# EAGLE board full computer (EAGLE 9.6.2), part 1 of 2
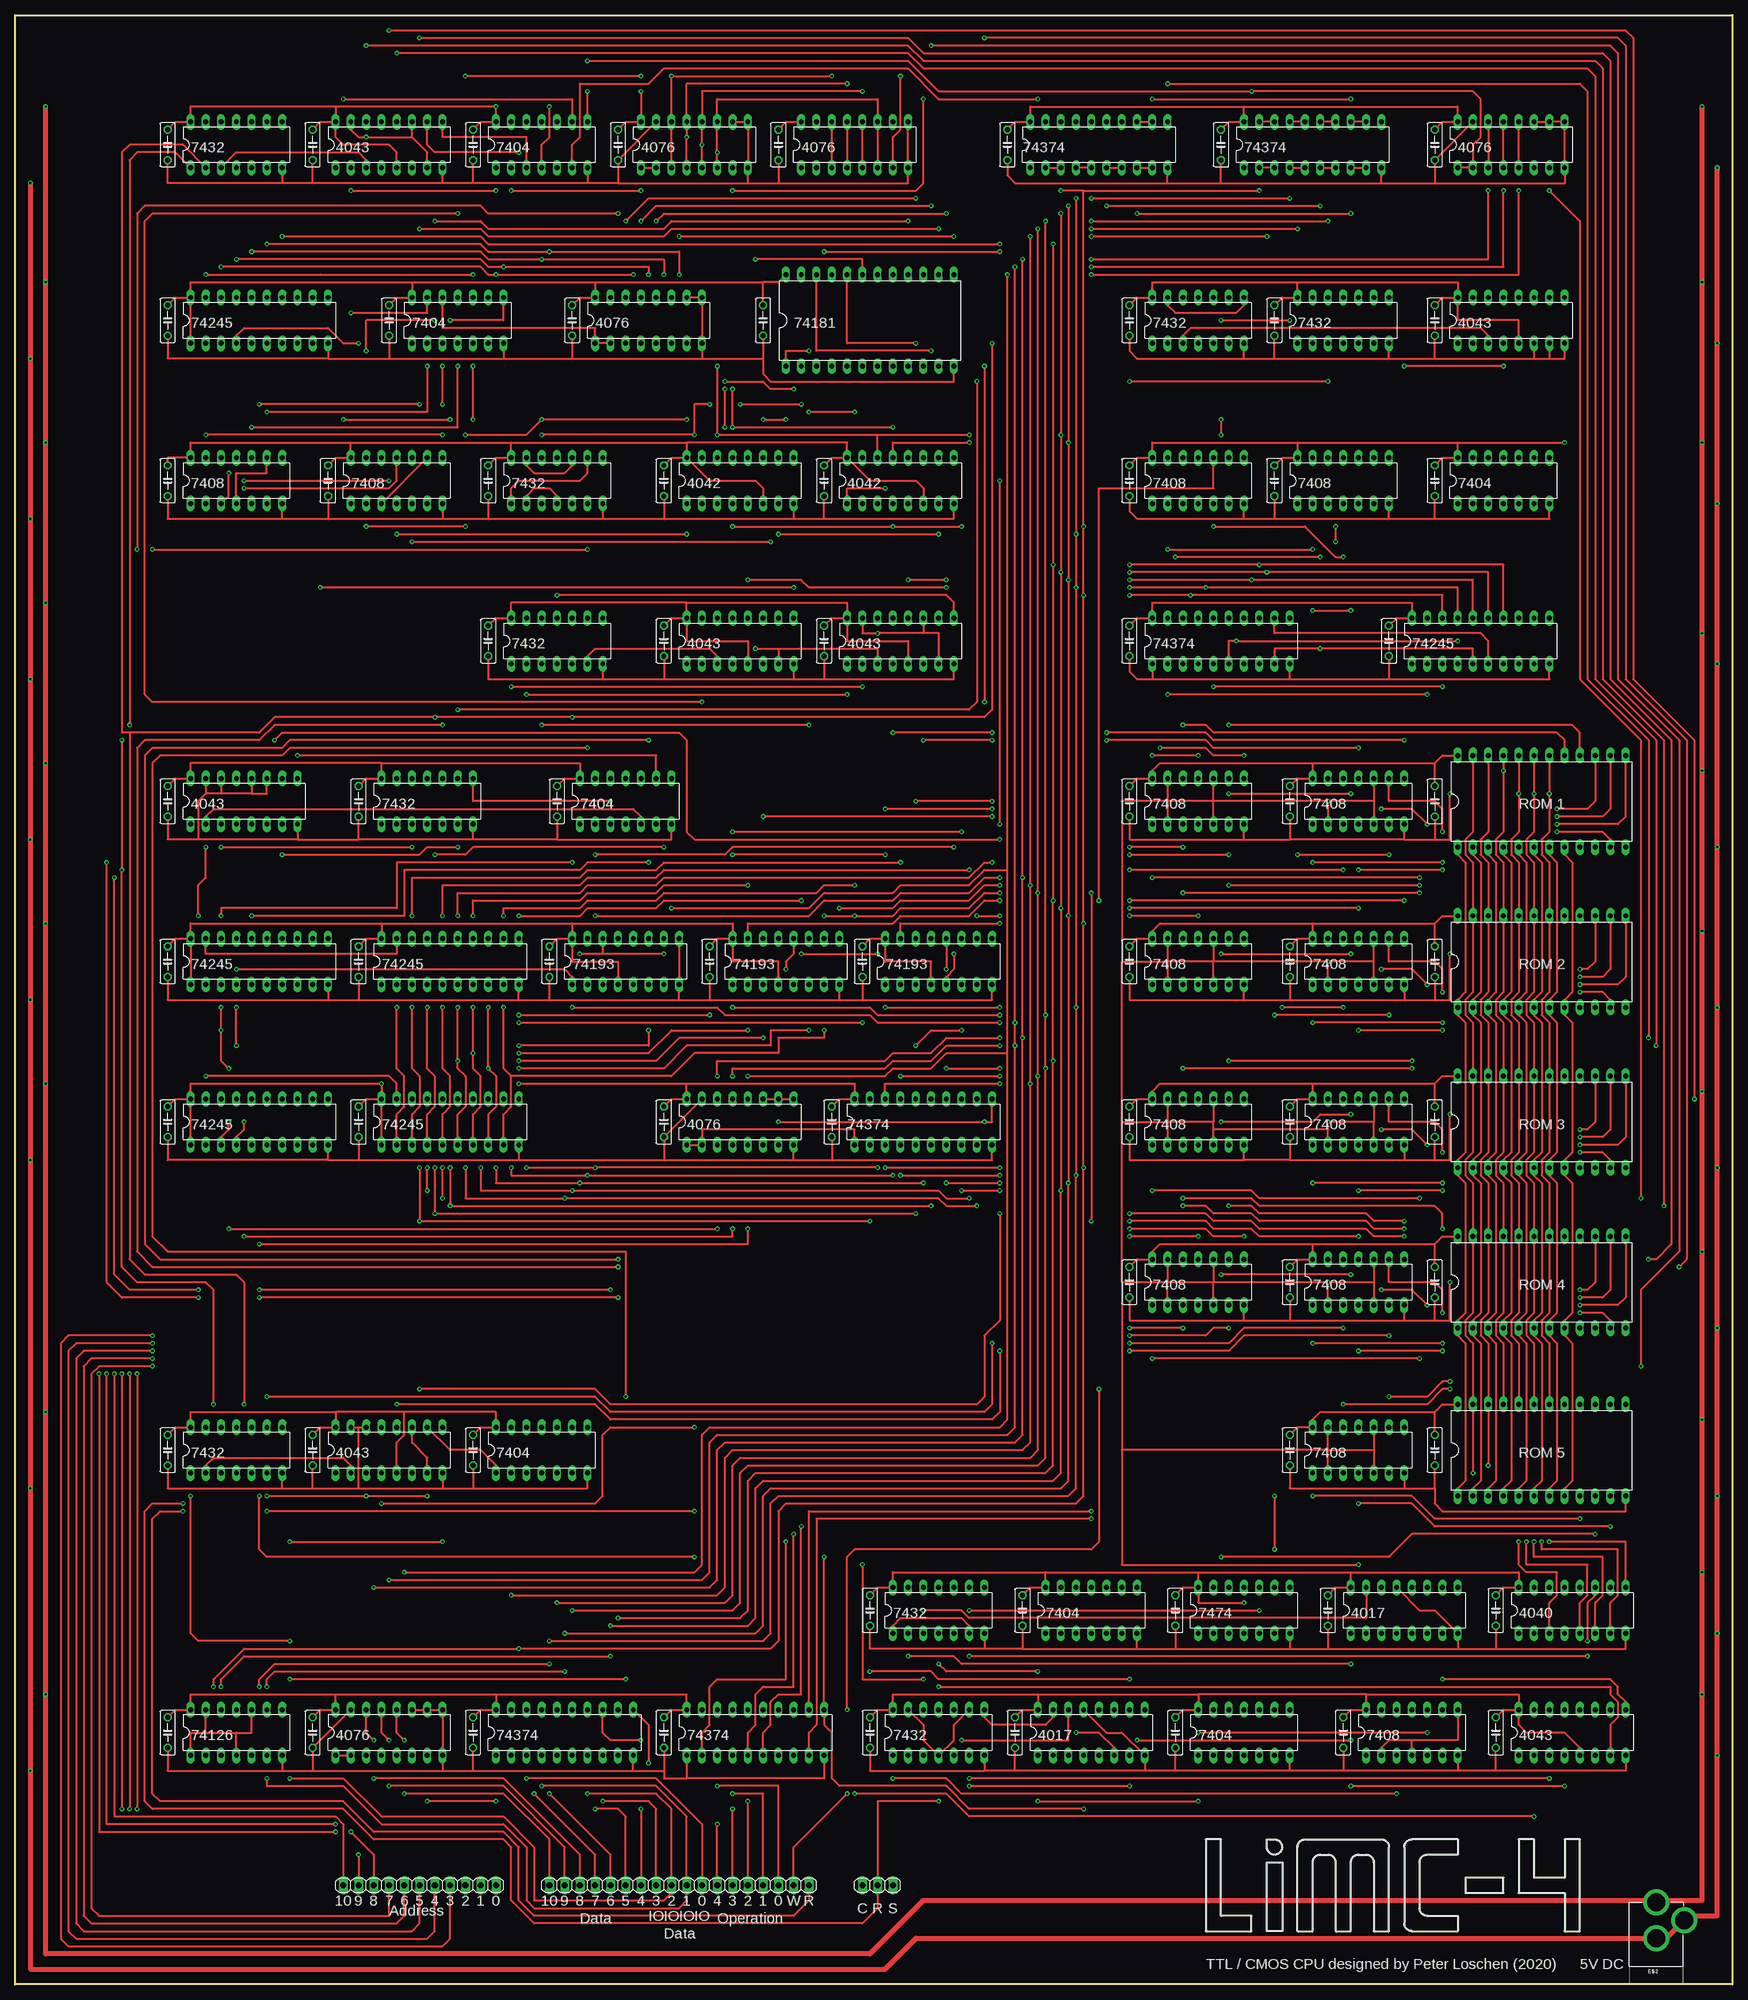
[diagram p0: board, top side]
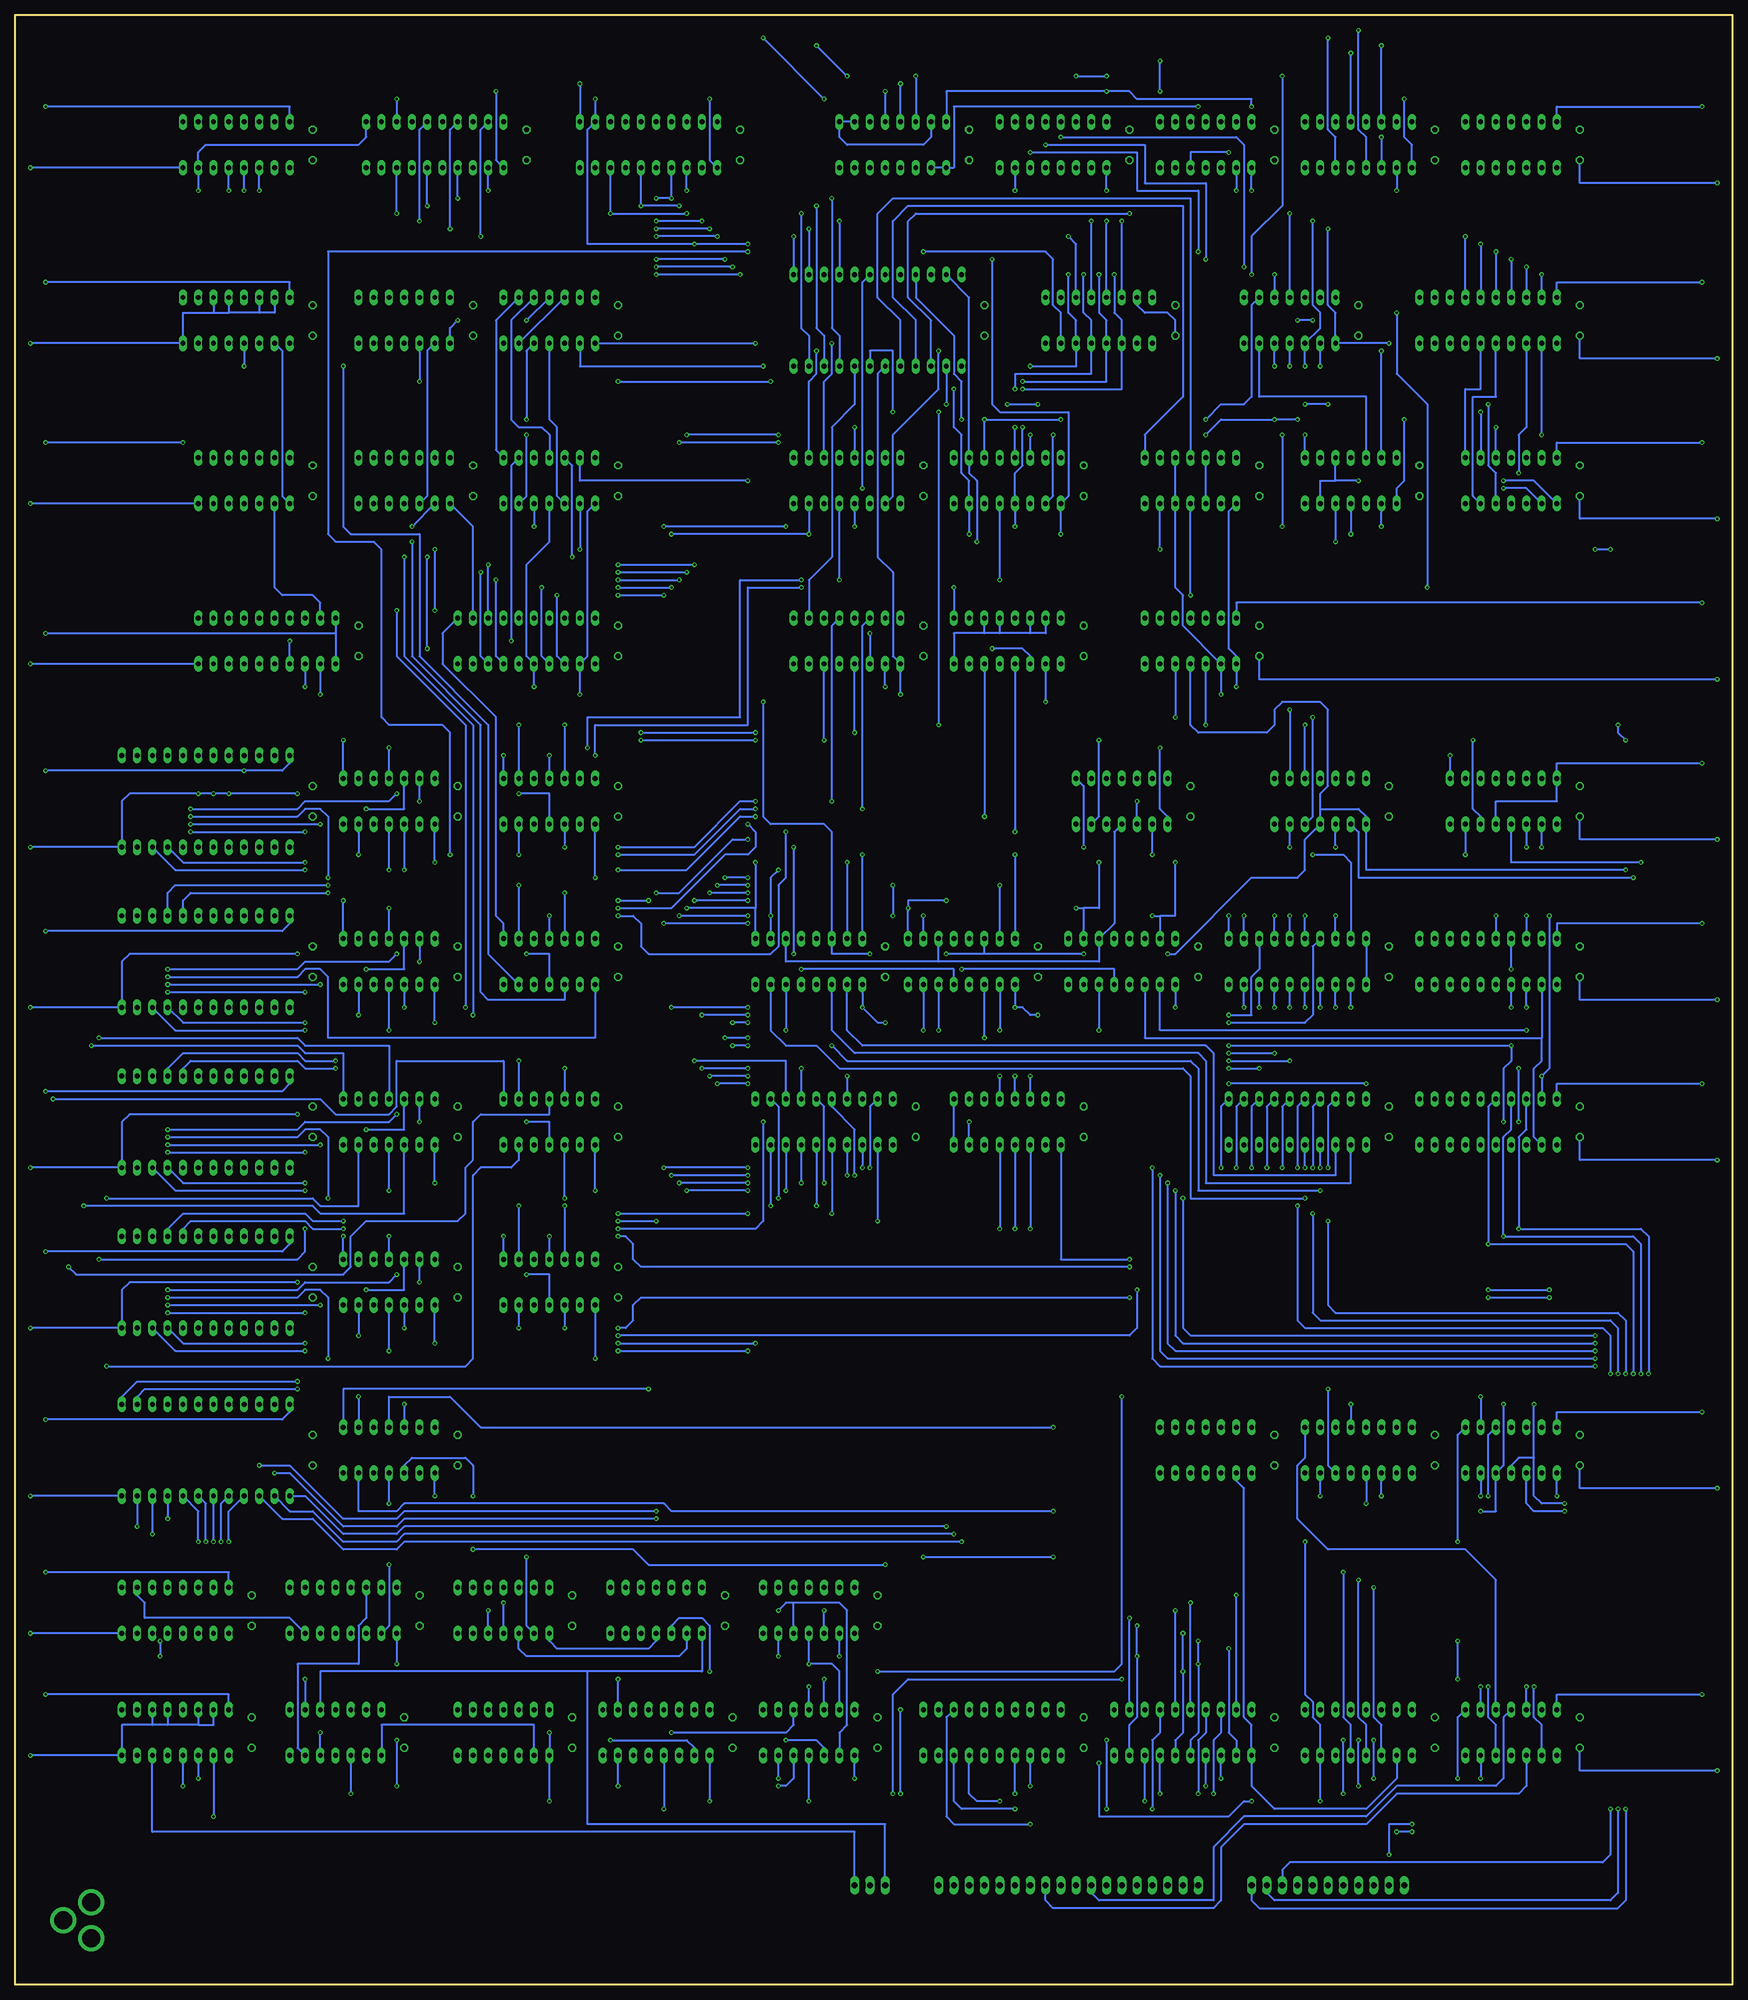
[diagram p1: board, bottom side, seen from below]

Size 285.75 x 327.66 mm. Coordinates in mm from the lower left corner, seen from the top.
Outline: 0,327.66 285.75,327.66 285.75,0 0,0 0,327.66
Copper layers (1*16): Top 0.035mm / dielectric 1.5mm / Bottom 0.035mm
Design rules "default": minimum track width 6mil, minimum drill 0.35mm, track to track 6mil, track to pad 6mil, pad to pad 6mil, via to via 6mil, smd to smd 6mil, copper to edge 40mil, drill to drill 6mil, minimum pad ring 10mil, minimum via ring 8mil, stop-mask expansion 4mil, vias tented up to drill 0mil, thermal gap 10mil

## Footprints (pad centres in the part's own frame; a part is rotated, then mirrored left to right if it is on the bottom)
C050-025X075 = drill 0.813 octagon: 1 -2.54,0; 2 2.54,0
POWER_JACK_PTH = drill 2.997 pad 4.318: GND 0,7.7; GNDBREAK 4.7,10.7; PWR 0,13.7
DIL16 = drill 0.813 long: 1 -8.89,-3.81; 2 -6.35,-3.81; 3 -3.81,-3.81; 4 -1.27,-3.81; 5 1.27,-3.81; 6 3.81,-3.81; 7 6.35,-3.81; 8 8.89,-3.81; 9 8.89,3.81; 10 6.35,3.81; 11 3.81,3.81; 12 1.27,3.81; 13 -1.27,3.81; 14 -3.81,3.81; 15 -6.35,3.81; 16 -8.89,3.81
DIL14 = drill 0.813 long: 1 -7.62,-3.81; 2 -5.08,-3.81; 3 -2.54,-3.81; 4 0,-3.81; 5 2.54,-3.81; 6 5.08,-3.81; 7 7.62,-3.81; 8 7.62,3.81; 9 5.08,3.81; 10 2.54,3.81; 11 0,3.81; 12 -2.54,3.81; 13 -5.08,3.81; 14 -7.62,3.81
DIL24-6 = drill 0.813 long: 1 -13.97,-7.62; 2 -11.43,-7.62; 3 -8.89,-7.62; 4 -6.35,-7.62; 5 -3.81,-7.62; 6 -1.27,-7.62; 7 1.27,-7.62; 8 3.81,-7.62; 9 6.35,-7.62; 10 8.89,-7.62; 11 11.43,-7.62; 12 13.97,-7.62; 13 13.97,7.62; 14 11.43,7.62; 15 8.89,7.62; 16 6.35,7.62; 17 3.81,7.62; 18 1.27,7.62; 19 -1.27,7.62; 20 -3.81,7.62; 21 -6.35,7.62; 22 -8.89,7.62; 23 -11.43,7.62; 24 -13.97,7.62
DIL20 = drill 0.813 long: 1 -11.43,-3.81; 2 -8.89,-3.81; 3 -6.35,-3.81; 4 -3.81,-3.81; 5 -1.27,-3.81; 6 1.27,-3.81; 7 3.81,-3.81; 8 6.35,-3.81; 9 8.89,-3.81; 10 11.43,-3.81; 11 11.43,3.81; 12 8.89,3.81; 13 6.35,3.81; 14 3.81,3.81; 15 1.27,3.81; 16 -1.27,3.81; 17 -3.81,3.81; 18 -6.35,3.81; 19 -8.89,3.81; 20 -11.43,3.81
1X03 = drill 1.016 long: 1 -2.54,0; 2 0,0; 3 2.54,0
1X18 = drill 1.016 long: 1 -21.59,0; 2 -19.05,0; 3 -16.51,0; 4 -13.97,0; 5 -11.43,0; 6 -8.89,0; 7 -6.35,0; 8 -3.81,0; 9 -1.27,0; 10 1.27,0; 11 3.81,0; 12 6.35,0; 13 8.89,0; 14 11.43,0; 15 13.97,0; 16 16.51,0; 17 19.05,0; 18 21.59,0
1X11 = drill 1.016 long: 1 -12.7,0; 2 -10.16,0; 3 -7.62,0; 4 -5.08,0; 5 -2.54,0; 6 0,0; 7 2.54,0; 8 5.08,0; 9 7.62,0; 10 10.16,0; 11 12.7,0

## Placement (x,y rotation side)
E$1  [C050-025X075]  236.22,196.85 90 top
E$2  [POWER_JACK_PTH]  273.05,0 0 top
E$3  [C050-025X075]  236.22,170.18 90 top
E$4  [C050-025X075]  236.22,143.51 90 top
E$5  [C050-025X075]  236.22,116.84 90 top
E$6  [C050-025X075]  236.22,88.9 90 top
E$7  [C050-025X075]  212.09,88.9 90 top
E$8  [C050-025X075]  212.09,116.84 90 top
E$9  [C050-025X075]  212.09,143.51 90 top
E$10  [C050-025X075]  212.09,170.18 90 top
E$11  [C050-025X075]  212.09,196.85 90 top
E$12  [C050-025X075]  185.42,196.85 90 top
E$13  [C050-025X075]  185.42,170.18 90 top
E$14  [C050-025X075]  185.42,143.51 90 top
E$15  [C050-025X075]  185.42,116.84 90 top
E$16  [C050-025X075]  246.38,62.23 90 top
E$17  [C050-025X075]  218.44,62.23 90 top
E$18  [C050-025X075]  193.04,62.23 90 top
E$19  [C050-025X075]  167.64,62.23 90 top
E$20  [C050-025X075]  142.24,62.23 90 top
E$21  [C050-025X075]  142.24,41.91 90 top
E$22  [C050-025X075]  166.37,41.91 90 top
E$23  [C050-025X075]  193.04,41.91 90 top
E$24  [C050-025X075]  25.4,41.91 90 top
E$25  [C050-025X075]  246.38,41.91 90 top
E$26  [C050-025X075]  220.98,41.91 90 top
E$27  [C050-025X075]  107.95,41.91 90 top
E$28  [C050-025X075]  76.2,41.91 90 top
E$29  [C050-025X075]  49.53,41.91 90 top
E$30  [C050-025X075]  25.4,88.9 90 top
E$31  [C050-025X075]  49.53,88.9 90 top
E$32  [C050-025X075]  76.2,88.9 90 top
E$33  [C050-025X075]  135.89,143.51 90 top
E$34  [C050-025X075]  107.95,143.51 90 top
E$35  [C050-025X075]  57.15,143.51 90 top
E$36  [C050-025X075]  25.4,143.51 90 top
E$37  [C050-025X075]  25.4,170.18 90 top
E$38  [C050-025X075]  57.15,170.18 90 top
E$39  [C050-025X075]  88.9,170.18 90 top
E$40  [C050-025X075]  115.57,170.18 90 top
E$41  [C050-025X075]  140.97,170.18 90 top
E$42  [C050-025X075]  25.4,196.85 90 top
E$43  [C050-025X075]  57.15,196.85 90 top
E$44  [C050-025X075]  90.17,196.85 90 top
E$45  [C050-025X075]  185.42,223.52 90 top
E$46  [C050-025X075]  228.6,223.52 90 top
E$47  [C050-025X075]  185.42,250.19 90 top
E$48  [C050-025X075]  209.55,250.19 90 top
E$49  [C050-025X075]  185.42,276.86 90 top
E$50  [C050-025X075]  209.55,276.86 90 top
E$51  [C050-025X075]  236.22,276.86 90 top
E$52  [C050-025X075]  236.22,250.19 90 top
E$53  [C050-025X075]  124.46,276.86 90 top
E$54  [C050-025X075]  107.95,250.19 90 top
E$55  [C050-025X075]  134.62,250.19 90 top
E$56  [C050-025X075]  78.74,250.19 90 top
E$57  [C050-025X075]  52.07,250.19 90 top
E$58  [C050-025X075]  25.4,250.19 90 top
E$59  [C050-025X075]  92.71,276.86 90 top
E$60  [C050-025X075]  62.23,276.86 90 top
E$61  [C050-025X075]  134.62,223.52 90 top
E$62  [C050-025X075]  107.95,223.52 90 top
E$63  [C050-025X075]  25.4,276.86 90 top
E$64  [C050-025X075]  78.74,223.52 90 top
E$65  [C050-025X075]  76.2,306.07 90 top
E$66  [C050-025X075]  49.53,306.07 90 top
E$67  [C050-025X075]  25.4,306.07 90 top
E$68  [C050-025X075]  100.33,306.07 90 top
E$69  [C050-025X075]  127,306.07 90 top
E$70  [C050-025X075]  236.22,306.07 90 top
E$71  [C050-025X075]  200.66,306.07 90 top
E$72  [C050-025X075]  165.1,306.07 90 top
IC1  4017N  [DIL16]  179.07,41.91 0 top
IC2  4043N  [DIL16]  259.08,41.91 0 top
IC3  74LS32N  [DIL14]  153.67,41.91 0 top
IC4  74ALS08N  [DIL14]  232.41,41.91 0 top
IC5  74ALS04N  [DIL14]  204.47,41.91 0 top
IC6  4040N  [DIL16]  259.08,62.23 0 top
IC7  4017N  [DIL16]  231.14,62.23 0 top
IC8  74LS32N  [DIL14]  153.67,62.23 0 top
IC9  74LS74N  [DIL14]  204.47,62.23 0 top
IC10  74ALS04N  [DIL14]  179.07,62.23 0 top
IC11  28C16AP  [DIL24-6]  254,196.85 0 top
IC12  28C16AP  [DIL24-6]  254,170.18 0 top
IC13  28C16AP  [DIL24-6]  254,143.51 0 top
IC14  28C16AP  [DIL24-6]  254,116.84 0 top
IC15  28C16AP  [DIL24-6]  254,88.9 0 top
IC16  74ALS08N  [DIL14]  223.52,196.85 0 top
IC17  74ALS08N  [DIL14]  196.85,196.85 0 top
IC18  74ALS08N  [DIL14]  223.52,170.18 0 top
IC19  74ALS08N  [DIL14]  196.85,170.18 0 top
IC20  74ALS08N  [DIL14]  223.52,143.51 0 top
IC21  74ALS08N  [DIL14]  196.85,143.51 0 top
IC22  74ALS08N  [DIL14]  223.52,116.84 0 top
IC23  74ALS08N  [DIL14]  196.85,116.84 0 top
IC24  74ALS08N  [DIL14]  223.52,88.9 0 top
IC25  4076N  [DIL16]  62.23,41.91 0 top
IC26  74LS32N  [DIL14]  36.83,88.9 0 top
IC27  4043N  [DIL16]  62.23,88.9 0 top
IC28  74LS374N  [DIL20]  91.44,41.91 0 top
IC29  74LS374N  [DIL20]  123.19,41.91 0 top
IC30  74LS126N  [DIL14]  36.83,41.91 0 top
IC31  74ALS04N  [DIL14]  87.63,88.9 0 top
IC32  74LS245N  [DIL20]  72.39,170.18 0 top
IC33  74LS245N  [DIL20]  40.64,170.18 0 top
IC34  4043N  [DIL16]  38.1,196.85 0 top
IC35  74LS245N  [DIL20]  72.39,143.51 0 top
IC36  74LS245N  [DIL20]  40.64,143.51 0 top
IC37  74LS374N  [DIL20]  151.13,143.51 0 top
IC38  4076N  [DIL16]  120.65,143.51 0 top
IC39  74ALS04N  [DIL14]  101.6,196.85 0 top
IC40  74LS32N  [DIL14]  68.58,196.85 0 top
IC41  74S181N  [DIL24-6]  142.24,276.86 0 top
IC42  4042N  [DIL16]  120.65,250.19 0 top
IC43  4042N  [DIL16]  147.32,250.19 0 top
IC44  74LS32N  [DIL14]  90.17,250.19 0 top
IC45  74LS32N  [DIL14]  90.17,223.52 0 top
IC46  74ALS04N  [DIL14]  73.66,276.86 0 top
IC47  74LS245N  [DIL20]  40.64,276.86 0 top
IC48  4043N  [DIL16]  147.32,223.52 0 top
IC49  4043N  [DIL16]  120.65,223.52 0 top
IC50  4076N  [DIL16]  105.41,276.86 0 top
IC51  74ALS08N  [DIL14]  63.5,250.19 0 top
IC52  74ALS08N  [DIL14]  36.83,250.19 0 top
IC53  74ALS08N  [DIL14]  196.85,250.19 0 top
IC54  74ALS08N  [DIL14]  220.98,250.19 0 top
IC55  74LS32N  [DIL14]  196.85,276.86 0 top
IC56  4043N  [DIL16]  248.92,276.86 0 top
IC57  74ALS04N  [DIL14]  247.65,250.19 0 top
IC58  74LS245N  [DIL20]  243.84,223.52 0 top
IC59  74LS32N  [DIL14]  220.98,276.86 0 top
IC60  74LS374N  [DIL20]  200.66,223.52 0 top
IC61  4043N  [DIL16]  62.23,306.07 0 top
IC62  74LS32N  [DIL14]  36.83,306.07 0 top
IC63  4076N  [DIL16]  113.03,306.07 0 top
IC64  4076N  [DIL16]  139.7,306.07 0 top
IC65  74LS374N  [DIL20]  180.34,306.07 0 top
IC66  74LS374N  [DIL20]  215.9,306.07 0 top
IC67  4076N  [DIL16]  248.92,306.07 0 top
IC68  74ALS04N  [DIL14]  87.63,306.07 0 top
JP1  [1X03]  143.51,16.51 180 top
JP2  [1X18]  110.49,16.51 180 top
JP3  [1X11]  67.31,16.51 180 top
V1  74193N  [DIL16]  153.67,170.18 0 top
V2  74193N  [DIL16]  128.27,170.18 0 top
V3  74193N  [DIL16]  101.6,170.18 0 top

## Library data of the parts
E$1 E$3-E$72 = adafruit
E$2 = SparkFun-Connectors
IC1 IC2 IC6 IC7 IC25 IC27 IC34 IC38 IC42 IC43 IC48-IC50 IC56 IC61 IC63 IC64 IC67 = 40xx
IC3-IC5 IC8-IC10 IC16-IC24 IC26 IC28-IC33 IC35-IC37 IC39-IC41 IC44-IC47 IC51-IC55 IC57-IC60 IC62 IC65 IC66 IC68 = 74xx-us
IC11-IC15 = microchip; MPN: CAT28C16ALI-12; OC_FARNELL: 1718292; OC_NEWARK: 06R0648
JP1-JP3 = pinhead
V1-V3 = 74ttl-din

## Nets
ACCUMULATORLATCH: IC16.6 IC50.7
ACCUMULATOROUTPUT: IC16.3 IC49.6
ADDRESS0: IC35.18 IC37.2 JP3.1
ADDRESS1: IC35.17 IC37.5 JP3.2
ADDRESS2: IC35.16 IC37.6 JP3.3
ADDRESS3: IC35.15 IC37.9 JP3.4
ADDRESS4: IC35.14 IC37.12 JP3.5
ADDRESS5: IC35.13 IC37.15 JP3.6
ADDRESS6: IC35.12 IC37.16 JP3.7
ADDRESS7: IC35.11 IC37.19 JP3.8
ADDRESS8: IC36.18 IC38.3 JP3.9
ADDRESS9: IC36.17 IC38.4 JP3.10
ADDRESS10: IC36.16 IC38.5 JP3.11
ALUFLAGOUT: IC19.11 IC49.4
BUFFERTODATABUS: IC22.6 IC27.12
CUREAD: IC2.2 IC26.1
D0: IC28.3 IC30.3 JP2.8
D1: IC28.4 IC30.6 JP2.9
D2: IC28.7 IC30.8 JP2.10
D3: IC28.8 IC30.11 JP2.11
D4: IC28.13 JP2.12
D5: IC28.14 JP2.13
D6: IC28.17 JP2.14
D7: IC28.18 JP2.15
D8: IC25.14 JP2.16
D9: IC25.13 JP2.17
D10: IC25.12 JP2.18
DATABUS0: IC28.2 IC30.2 IC32.18 IC37.3 IC42.4 IC43.4 IC47.18 IC50.3 IC58.18 IC60.3 IC63.3 IC63.14 IC64.3 IC64.14 IC65.2 IC65.3 IC66.2 IC66.3 V1.15
DATABUS1: IC28.5 IC30.5 IC32.17 IC37.4 IC42.7 IC43.7 IC47.17 IC50.4 IC58.17 IC60.4 IC63.4 IC63.13 IC64.4 IC64.13 IC65.4 IC65.5 IC66.4 IC66.5 V1.1
DATABUS2: IC28.6 IC30.9 IC32.16 IC37.7 IC42.13 IC43.13 IC47.16 IC50.5 IC58.16 IC60.7 IC63.5 IC63.12 IC64.5 IC64.12 IC65.6 IC65.7 IC66.6 IC66.7 V1.10
DATABUS3: IC28.9 IC30.12 IC32.15 IC37.8 IC42.14 IC43.14 IC47.15 IC50.6 IC58.15 IC60.8 IC63.6 IC63.11 IC64.6 IC64.11 IC65.8 IC65.9 IC66.8 IC66.9 V1.9
DATABUS4: IC28.12 IC32.14 IC37.13 IC47.14 IC58.14 IC60.13 IC65.12 IC65.13 IC66.12 IC66.13 V2.15
DATABUS5: IC28.15 IC32.13 IC37.14 IC66.14 IC66.15 V2.1
DATABUS6: IC28.16 IC32.12 IC37.17 IC66.16 IC66.17 V2.10
DATABUS7: IC28.19 IC32.11 IC37.18 IC66.18 IC66.19 V2.9
DATABUS8: IC25.3 IC33.18 IC38.14 IC67.3 IC67.14 V3.15
DATABUS9: IC25.4 IC33.17 IC38.13 IC67.4 IC67.13 V3.1
DATABUS10: IC25.5 IC33.16 IC38.12 IC67.5 IC67.12 V3.10
DATABUSTORAM: IC22.8 IC27.6
DECODECLOCK: IC4.6 IC7.14
EEPROMOUT: IC7.2 IC16.2 IC16.5 IC16.10 IC16.13 IC17.2 IC17.5 IC17.10 IC17.13 IC18.2 IC18.5 IC18.10 IC18.13 IC19.2 IC19.5 IC19.10 IC19.13 IC20.2 IC20.5 IC20.10 IC20.13 IC21.2 IC21.5 IC21.10 IC21.13 IC22.2 IC22.5 IC22.10 IC22.13 IC23.2 IC23.5 IC23.10 IC23.13 IC24.2 IC24.5 IC24.10 IC24.13
EEPROMRESET: IC9.2 IC15.10
FLAGJSRLATCH: IC20.11 IC65.11
FLAGJSROUTPUT: IC20.8 IC61.12
FLAGLATCH: IC19.8 IC60.11
FLAGOUTPUT: IC19.6 IC56.4
FUNCTION0: IC17.6 IC48.14
FUNCTION1: IC17.3 IC48.12
FUNCTION2: IC16.11 IC48.6
FUNCTION3: IC16.8 IC48.4
GND: E$1.1 E$2.GND E$2.GNDBREAK E$3.1 E$4.1 E$5.1 E$6.1 E$7.1 E$8.1 E$9.1 E$10.1 E$11.1 E$12.1 E$13.1 E$14.1 E$15.1 E$16.1 E$17.1 E$18.1 E$19.1 E$20.1 E$21.1 E$22.1 E$23.1 E$24.1 E$25.1 E$26.1 E$27.1 E$28.1 E$29.1 E$30.1 E$31.1 E$32.1 E$33.1 E$34.1 E$35.1 E$36.1 E$37.1 E$38.1 E$39.1 E$40.1 E$41.1 E$42.1 E$43.1 E$44.1 E$45.1 E$46.1 E$47.1 E$48.1 E$49.1 E$50.1 E$51.1 E$52.1 E$53.1 E$54.1 E$55.1 E$56.1 E$57.1 E$58.1 E$59.1 E$60.1 E$61.1 E$62.1 E$63.1 E$64.1 E$65.1 E$66.1 E$67.1 E$68.1 E$69.1 E$70.1 E$71.1 E$72.1 IC1.8 IC1.13 IC2.8 IC2.11 IC2.12 IC2.14 IC2.15 IC3.7 IC4.7 IC5.7 IC6.8 IC7.8 IC7.13 IC8.7 IC9.7 IC10.7 IC11.12 IC11.18 IC11.19 IC11.20 IC12.12 IC12.18 IC12.19 IC12.20 IC13.12 IC13.18 IC13.19 IC13.20 IC14.12 IC14.18 IC14.19 IC14.20 IC15.12 IC15.18 IC15.19 IC15.20 IC16.7 IC17.7 IC18.7 IC19.7 IC20.7 IC21.7 IC22.7 IC23.7 IC24.7 IC25.8 IC25.9 IC25.10 IC25.11 IC25.15 IC26.7 IC27.8 IC27.14 IC27.15 IC28.10 IC29.1 IC29.10 IC30.7 IC31.7 IC32.10 IC33.10 IC34.8 IC34.11 IC34.12 IC34.14 IC34.15 IC35.10 IC36.10 IC37.10 IC38.8 IC38.9 IC38.10 IC38.11 IC38.15 IC39.7 IC40.7 IC41.12 IC42.8 IC43.8 IC44.7 IC45.7 IC46.7 IC47.10 IC48.8 IC49.8 IC49.11 IC49.12 IC49.14 IC49.15 IC50.8 IC50.9 IC50.10 IC50.15 IC51.7 IC52.7 IC53.7 IC54.7 IC55.7 IC56.6 IC56.7 IC56.8 IC56.11 IC56.12 IC56.14 IC56.15 IC57.7 IC58.10 IC59.7 IC60.1 IC60.10 IC61.8 IC62.7 IC63.8 IC63.9 IC63.10 IC63.15 IC64.8 IC64.9 IC64.10 IC64.15 IC65.10 IC66.10 IC67.8 IC67.9 IC67.10 IC67.11 IC67.15 IC68.7 V1.8 V2.8 V3.8 V3.9
IOLATCH: IC1.4 IC26.10 IC29.11
LATCHRESET: IC24.6 IC26.5 IC40.5 IC45.5 IC55.1 IC62.2
MICROCODELATCH: IC22.3 IC26.9
MICROCODERAMREAD: IC24.11 IC27.4
N$1: V1.12 V2.5
N$2: IC1.2 IC2.4
N$3: IC2.3 IC3.6
N$4: V2.12 V3.5
N$5: IC1.7 IC3.5
N$6: IC1.1 IC4.5 IC5.1
N$7: IC4.1 IC5.2
N$8: IC3.1 IC4.3
N$9: IC1.14 IC3.3
N$10: IC39.4 V1.11 V2.11 V3.11
N$11: IC39.3 IC40.8
N$12: IC41.2 IC42.2 IC46.5 IC51.1
N$13: IC41.23 IC42.10 IC51.5
N$14: IC1.15 IC3.8
N$15: IC34.3 IC40.3
N$16: IC41.19 IC42.1 IC51.4
N$17: IC1.6 IC3.10
N$18: IC6.10 IC7.7
N$19: IC2.7 IC3.11
N$20: IC34.2 IC35.19 IC36.19 IC39.5
N$21: IC4.2 IC4.4 IC4.8
N$22: IC41.22 IC43.10
N$23: IC2.9 IC4.9
N$24: IC41.20 IC43.11
N$25: IC41.18 IC43.1
N$26: IC41.1 IC43.2
N$29: IC7.1 IC8.2
N$30: IC7.15 IC8.3
N$32: IC6.11 IC8.1 IC8.6
N$33: IC26.6 IC27.3 IC27.7 IC27.11
N$36: IC44.2 IC44.4 IC48.9
N$37: IC26.2 IC27.2
N$38: IC44.3 IC44.12
N$39: IC41.5 IC44.11
N$40: IC9.3 IC10.2
N$41: IC44.1 IC44.9 IC45.1 IC48.2
N$42: IC27.9 IC30.1 IC30.4 IC30.10 IC30.13
N$43: IC9.1 IC10.4
N$44: IC11.9 IC16.1
N$45: IC11.10 IC16.4
N$46: IC11.11 IC16.9
N$47: IC11.13 IC16.12
N$48: IC11.14 IC17.1
N$49: IC11.15 IC17.4
N$50: IC11.16 IC17.9
N$51: IC11.17 IC17.12
N$52: IC32.2 IC35.2 V1.3
N$53: IC12.9 IC18.1
N$54: IC12.10 IC18.4
N$55: IC12.11 IC18.9
N$56: IC12.13 IC18.12
N$57: IC12.14 IC19.1
N$58: IC12.15 IC19.4
N$59: IC12.16 IC19.9
N$60: IC12.17 IC19.12
N$61: IC13.9 IC20.1
N$62: IC13.10 IC20.4
N$63: IC13.11 IC20.9
N$64: IC13.13 IC20.12
N$65: IC13.14 IC21.1
N$66: IC13.15 IC21.4
N$67: IC13.16 IC21.9
N$68: IC13.17 IC21.12
N$69: IC14.9 IC22.1
N$70: IC14.10 IC22.4
N$71: IC14.11 IC22.9
N$72: IC14.13 IC22.12
N$73: IC14.14 IC23.1
N$74: IC14.15 IC23.4
N$75: IC14.16 IC23.9
N$76: IC14.17 IC23.12
N$77: IC15.9 IC24.1
N$78: IC15.11 IC24.4
N$79: IC15.13 IC24.9
N$80: IC15.14 IC24.12
N$81: IC32.3 IC35.3 V1.2
N$82: IC32.5 IC35.5 V1.7
N$83: IC27.10 IC31.1
N$84: IC32.6 IC35.6 V2.3
N$85: IC32.7 IC35.7 V2.2
N$86: IC32.8 IC35.8 V2.6
N$87: IC33.2 IC36.2 V3.3
N$88: IC33.3 IC36.3 V3.2
N$89: IC33.4 IC36.4 V3.6
N$90: IC41.3 IC44.6
N$91: IC41.6 IC44.5 IC44.10 IC44.13 IC45.2 IC48.1
N$92: IC34.7 IC40.6
N$93: IC41.4 IC44.8
N$94: IC34.9 IC39.9
N$95: IC32.19 IC33.19 IC39.8
N$96: IC32.4 IC35.4 V1.6
N$97: IC41.8 IC48.10
N$98: IC41.7 IC45.3
N$99: IC41.9 IC50.14
N$100: IC41.10 IC50.13
N$101: IC25.7 IC26.8 IC28.11
N$102: IC25.1 IC25.2 IC28.1 IC31.2
N$103: IC41.11 IC50.12
N$104: IC41.13 IC50.11
N$105: IC53.1 IC58.2 IC60.2
N$106: IC41.16 IC46.3 IC52.5
N$107: IC46.4 IC52.10
N$108: IC41.14 IC46.1 IC47.4
N$109: IC46.2 IC52.4 IC52.9
N$110: IC51.3 IC51.9
N$111: IC51.6 IC51.10 IC52.1
N$112: IC41.21 IC42.11 IC46.9 IC51.2
N$113: IC46.8 IC51.13
N$114: IC46.6 IC51.12
N$115: IC51.11 IC52.2
N$116: IC47.3 IC52.3
N$117: IC47.2 IC51.8
N$118: IC47.5 IC52.6
N$119: IC47.6 IC52.8
N$120: IC32.9 IC35.9 V2.7
N$121: IC37.1 IC38.1 IC38.2 IC39.6
N$122: IC46.10 IC47.19
N$123: IC39.2 V1.5
N$124: IC46.11 IC49.2
N$125: IC46.13 IC49.9
N$126: IC53.4 IC58.3 IC60.5
N$127: IC53.9 IC58.4 IC60.6
N$128: IC53.12 IC58.5 IC60.9
N$129: IC54.1 IC58.6 IC60.12
N$130: IC45.6 IC48.3 IC48.7 IC48.11 IC48.15 IC49.3 IC49.7
N$133: IC46.12 IC50.1 IC50.2
N$137: IC55.3 IC56.3
N$140: IC61.1 IC68.9
N$141: IC56.2 IC57.1
N$142: IC57.2 IC58.19
N$145: IC61.3 IC61.7 IC61.11 IC61.15 IC62.3
N$147: IC61.2 IC68.1
N$148: IC53.3 IC55.4
N$149: IC53.6 IC55.5
N$150: IC53.8 IC55.9
N$151: IC53.11 IC55.10
N$152: IC55.6 IC55.12
N$153: IC55.8 IC55.13
N$154: IC55.11 IC59.1
N$155: IC54.3 IC59.2
N$157: IC61.9 IC68.3
N$159: IC61.10 IC68.5
N$162: IC63.1 IC63.2 IC68.2
N$163: IC64.1 IC64.2 IC68.4
N$164: IC65.1 IC68.6
N$166: IC66.1 IC67.1 IC67.2 IC68.8
OP0: IC29.3 JP2.3
OP1: IC29.4 JP2.4
OP2: IC29.7 JP2.5
OP3: IC29.8 JP2.6
OP4: IC29.13 JP2.7
OPCOUNTER0: IC6.9 IC11.8 IC12.8 IC13.8 IC14.8 IC15.8
OPCOUNTER1: IC6.7 IC11.7 IC12.7 IC13.7 IC14.7 IC15.7
OPCOUNTER2: IC6.6 IC11.6 IC12.6 IC13.6 IC14.6 IC15.6
OPCOUNTER3: IC6.5 IC11.5 IC12.5 IC13.5 IC14.5 IC15.5
OPCOUNTER4: IC6.3 IC11.4 IC12.4 IC13.4 IC14.4 IC15.4
OPERATIONDONE: IC3.2 IC8.5 IC9.5
OPREGISTER0: IC11.3 IC12.3 IC13.3 IC14.3 IC15.3 IC29.2
OPREGISTER1: IC11.2 IC12.2 IC13.2 IC14.2 IC15.2 IC29.5
OPREGISTER2: IC11.1 IC12.1 IC13.1 IC14.1 IC15.1 IC29.6
OPREGISTER3: IC11.23 IC12.23 IC13.23 IC14.23 IC15.23 IC29.9
OPREGISTER4: IC11.22 IC12.22 IC13.22 IC14.22 IC15.22 IC29.12
OVERFLOW: IC18.6 IC53.5
PC1ACTIVE: IC23.6 IC40.2
PC1FLAGLATCH: IC40.9 IC59.3
PC1LATCH: IC23.11 IC40.10
PC1TODATABUS: IC22.11 IC34.6
PC2ACTIVE: IC23.3 IC34.4
PC2LATCH: IC23.8 IC37.11 IC38.7
PCINC: IC1.10 IC39.1
PCJSRLATCH: IC20.6 IC66.11 IC67.7
PCJSROUTPUT: IC20.3 IC61.14
RAMREAD: IC26.3 JP2.1
RAMWRITE: IC24.8 JP2.2
START: IC2.6 JP1.1
STOP: IC3.12 IC24.3
SYSTEMCLOCK: IC4.10 IC10.1 JP1.3
SYSTEMRESET: IC3.4 IC3.9 IC3.13 IC8.4 IC10.3 IC26.4 IC40.1 IC40.4 IC45.4 IC55.2 IC62.1 JP1.2 V1.14 V2.14 V3.14
UNDERFLOW: IC18.3 IC53.2
VCC: E$1.2 E$2.PWR E$3.2 E$4.2 E$5.2 E$6.2 E$7.2 E$8.2 E$9.2 E$10.2 E$11.2 E$12.2 E$13.2 E$14.2 E$15.2 E$16.2 E$17.2 E$18.2 E$19.2 E$20.2 E$21.2 E$22.2 E$23.2 E$24.2 E$25.2 E$26.2 E$27.2 E$28.2 E$29.2 E$30.2 E$31.2 E$32.2 E$33.2 E$34.2 E$35.2 E$36.2 E$37.2 E$38.2 E$39.2 E$40.2 E$41.2 E$42.2 E$43.2 E$44.2 E$45.2 E$46.2 E$47.2 E$48.2 E$49.2 E$50.2 E$51.2 E$52.2 E$53.2 E$54.2 E$55.2 E$56.2 E$57.2 E$58.2 E$59.2 E$60.2 E$61.2 E$62.2 E$63.2 E$64.2 E$65.2 E$66.2 E$67.2 E$68.2 E$69.2 E$70.2 E$71.2 E$72.2 IC1.16 IC2.5 IC2.16 IC3.14 IC4.14 IC5.14 IC6.16 IC7.16 IC8.14 IC9.4 IC9.14 IC10.14 IC11.21 IC11.24 IC12.21 IC12.24 IC13.21 IC13.24 IC14.21 IC14.24 IC15.21 IC15.24 IC16.14 IC17.14 IC18.14 IC19.14 IC20.14 IC21.14 IC22.14 IC23.14 IC24.14 IC25.16 IC26.14 IC27.5 IC27.16 IC28.20 IC29.20 IC30.14 IC31.14 IC32.1 IC32.20 IC33.1 IC33.20 IC34.5 IC34.16 IC35.1 IC35.20 IC36.1 IC36.20 IC37.20 IC38.16 IC39.14 IC40.14 IC41.24 IC42.6 IC42.16 IC43.6 IC43.16 IC44.14 IC45.14 IC46.14 IC47.1 IC47.20 IC48.5 IC48.16 IC49.5 IC49.16 IC50.16 IC51.14 IC52.14 IC53.14 IC54.14 IC55.14 IC56.5 IC56.16 IC57.14 IC58.1 IC58.20 IC59.14 IC60.20 IC61.5 IC61.16 IC62.14 IC63.16 IC64.16 IC65.20 IC66.20 IC67.16 IC68.14 V1.4 V1.16 V2.4 V2.16 V3.4 V3.16
X<Y: IC18.11 IC53.13
X=Y: IC18.8 IC53.10
X>Y: IC19.3 IC54.2
XJSRLATCH: IC21.11 IC63.7
XJSROUTPUT: IC21.8 IC61.4
XLATCH: IC17.11 IC42.5
YJSRLATCH: IC21.6 IC64.7
YJSROUTPUT: IC21.3 IC61.6
YLATCH: IC17.8 IC43.5

## Tracks (layer width: path | path; a pad name or v marks a point on that pad's centre or on a via)
ACCUMULATORLATCH  (via drill 0.35)
  Top 0.305: v134.62,288.29 v163.83,288.29 | v213.36,187.96 v228.6,187.96
  Bottom 0.305: IC16.6 v228.6,187.96 | IC50.7 111.76,278.13 113.03,279.4 113.03,287.02 114.3,288.29 v134.62,288.29 | v163.83,288.29 233.68,288.29 233.68,241.3 232.41,240.03 226.06,240.03 224.79,238.76 224.79,210.82 223.52,209.55 214.63,209.55 213.36,208.28 v213.36,187.96
ACCUMULATOROUTPUT  (via drill 0.35)
  Top 0.305: v220.98,185.42 v185.42,185.42 | v162.56,194.31 v124.46,194.31
  Bottom 0.305: IC16.3 v220.98,185.42 | IC49.6 v124.46,194.31 | v185.42,185.42 173.99,185.42 165.1,194.31 v162.56,194.31
ADDRESS0  (via drill 0.35)
  Top 0.305: v67.31,135.89 v67.31,127 v142.24,127 | v17.78,101.6 v17.78,29.21
  Bottom 0.305: IC35.18 67.31,146.05 v67.31,135.89 | IC37.2 v142.24,127 | v67.31,127 67.31,113.03 66.04,111.76 19.05,111.76 17.78,110.49 v17.78,101.6 | JP3.1 80.01,13.97 78.74,12.7 19.05,12.7 17.78,13.97 v17.78,29.21
ADDRESS1  (via drill 0.35)
  Top 0.305: v69.85,135.89 v69.85,128.27 v149.86,128.27 | v19.05,101.6 v19.05,29.21
  Bottom 0.305: IC35.17 69.85,146.05 v69.85,135.89 | IC37.5 v149.86,128.27 | JP3.2 77.47,15.24 76.2,13.97 20.32,13.97 19.05,15.24 v19.05,29.21 | v69.85,128.27 69.85,111.76 68.58,110.49 20.32,110.49 19.05,109.22 v19.05,101.6
ADDRESS2  (via drill 0.35)
  Top 0.305: v72.39,135.89 v72.39,129.54 v152.4,129.54 | v20.32,101.6 v20.32,29.21
  Bottom 0.305: IC35.16 72.39,146.05 v72.39,135.89 | IC37.6 v152.4,129.54 | v72.39,129.54 72.39,110.49 71.12,109.22 21.59,109.22 20.32,107.95 v20.32,101.6 | v20.32,29.21 20.32,21.59 21.59,20.32 73.66,20.32 74.93,19.05 JP3.3
ADDRESS3  (via drill 0.35)
  Top 0.305: v74.93,135.89 74.93,130.81 v91.44,130.81 153.67,130.81 154.94,129.54 v160.02,129.54 | JP3.4 72.39,7.62 71.12,6.35 8.89,6.35 7.62,7.62 7.62,106.68 8.89,107.95 v22.86,107.95
  Bottom 0.305: IC35.15 74.93,146.05 v74.93,135.89 | IC37.9 v160.02,129.54 | v91.44,130.81 91.44,109.22 90.17,107.95 v22.86,107.95
ADDRESS4  (via drill 0.35)
  Top 0.305: v77.47,135.89 77.47,132.08 v92.71,132.08 153.67,132.08 154.94,130.81 v158.75,130.81 | v22.86,106.68 10.16,106.68 8.89,105.41 8.89,8.89 10.16,7.62 68.58,7.62 69.85,8.89 JP3.5
  Bottom 0.305: IC35.14 77.47,146.05 v77.47,135.89 | v92.71,132.08 92.71,107.95 91.44,106.68 v22.86,106.68 | IC37.12 158.75,146.05 v158.75,130.81
ADDRESS5  (via drill 0.35)
  Top 0.305: v80.01,135.89 80.01,133.35 v93.98,133.35 v151.13,133.35 | v22.86,105.41 11.43,105.41 10.16,104.14 10.16,10.16 11.43,8.89 66.04,8.89 67.31,10.16 JP3.6
  Bottom 0.305: IC35.13 80.01,146.05 v80.01,135.89 | v22.86,105.41 92.71,105.41 93.98,106.68 v93.98,133.35 | IC37.15 151.13,146.05 v151.13,133.35
ADDRESS6  (via drill 0.35)
  Top 0.305: v82.55,135.89 82.55,134.62 v95.25,134.62 v146.05,134.62 | JP3.7 64.77,11.43 63.5,10.16 12.7,10.16 11.43,11.43 11.43,102.87 12.7,104.14 v22.86,104.14
  Bottom 0.305: IC35.12 82.55,146.05 v82.55,135.89 | v95.25,134.62 95.25,105.41 93.98,104.14 v22.86,104.14 | v146.05,134.62 146.05,142.24 149.86,146.05 IC37.16
ADDRESS7  (via drill 0.35)
  Top 0.305: v85.09,135.89 v96.52,135.89 v143.51,135.89 | v22.86,102.87 13.97,102.87 12.7,101.6 12.7,12.7 13.97,11.43 62.23,11.43 JP3.8
  Bottom 0.305: IC35.11 85.09,146.05 v85.09,135.89 | v96.52,135.89 96.52,104.14 95.25,102.87 v22.86,102.87 | v143.51,135.89 143.51,146.05 IC37.19
ADDRESS8  (via drill 0.35)
  Top 0.305: v35.56,125.73 v116.84,125.73 | v55.88,25.4 59.69,21.59 JP3.9 | v53.34,25.4 13.97,25.4 v13.97,101.6
  Bottom 0.305: IC38.3 v116.84,125.73 | v53.34,25.4 v55.88,25.4 | v13.97,101.6 13.97,124.46 15.24,125.73 v35.56,125.73 35.56,140.97 34.29,142.24 IC36.18
ADDRESS9  (via drill 0.35)
  Top 0.305: v38.1,124.46 119.38,124.46 v119.38,125.73 | v53.34,26.67 15.24,26.67 v15.24,101.6 | v57.15,21.59 JP3.10
  Bottom 0.305: IC38.4 v119.38,125.73 | v53.34,26.67 57.15,26.67 v57.15,21.59 | v15.24,101.6 15.24,123.19 16.51,124.46 v38.1,124.46 38.1,140.97 36.83,142.24 IC36.17
ADDRESS10  (via drill 0.35)
  Top 0.305: v40.64,123.19 121.92,123.19 v121.92,125.73 | JP3.11 54.61,26.67 53.34,27.94 16.51,27.94 v16.51,101.6
  Bottom 0.305: IC36.16 40.64,146.05 v40.64,123.19 17.78,123.19 16.51,121.92 v16.51,101.6 | IC38.5 v121.92,125.73
ALUFLAGOUT  (via drill 0.35)
  Top 0.305: v196.85,177.8 v185.42,177.8 | v157.48,191.77 v119.38,191.77
  Bottom 0.305: IC19.11 v196.85,177.8 | IC49.4 v119.38,191.77 | v157.48,191.77 157.48,184.15 158.75,182.88 158.75,172.72 160.02,171.45 180.34,171.45 181.61,172.72 181.61,176.53 182.88,177.8 v185.42,177.8
BUFFERTODATABUS  (via drill 0.35)
  Top 0.305: v228.6,107.95 204.47,107.95 201.93,105.41 v185.42,105.41 | v163.83,105.41 163.83,95.25 162.56,93.98 99.06,93.98 96.52,96.52 v63.5,96.52
  Bottom 0.305: IC22.6 v228.6,107.95 | v63.5,96.52 IC27.12 | v185.42,105.41 v163.83,105.41
CUREAD  (via drill 0.35)
  Top 0.305: v252.73,27.94 158.75,27.94 154.94,31.75 v139.7,31.75 | v101.6,50.8 v45.72,50.8 | v45.72,57.15 30.48,57.15 29.21,58.42 v29.21,81.28
  Bottom 0.305: IC2.2 v252.73,27.94 | v139.7,31.75 139.7,48.26 137.16,50.8 v101.6,50.8 | v45.72,50.8 v45.72,57.15 | v29.21,81.28 IC26.1
D0  (via drill 0.35)
  Top 0.305: JP2.8 114.3,26.67 106.68,34.29 v85.09,34.29
  Bottom 0.305: v85.09,34.29 IC28.3 | IC30.3 34.29,33.02 35.56,31.75 55.88,31.75 60.96,26.67 81.28,26.67 85.09,22.86 85.09,13.97 86.36,12.7 113.03,12.7 114.3,13.97 JP2.8
D1  (via drill 0.35)
  Top 0.305: v87.63,33.02 106.68,33.02 111.76,27.94 JP2.9 111.76,13.97 110.49,12.7 86.36,12.7 85.09,13.97 85.09,22.86 81.28,26.67 60.96,26.67 54.61,33.02 41.91,33.02 v41.91,34.29
  Bottom 0.305: v87.63,33.02 IC28.4 | IC30.6 v41.91,34.29
D2  (via drill 0.35)
  Top 0.305: v95.25,31.75 106.68,31.75 109.22,29.21 JP2.10 109.22,15.24 107.95,13.97 86.36,13.97 86.36,22.86 81.28,27.94 60.96,27.94 54.61,34.29 v45.72,34.29
  Bottom 0.305: v95.25,31.75 IC28.7 | IC30.8 45.72,44.45 v45.72,34.29
D3  (via drill 0.35)
  Top 0.305: JP2.11 106.68,29.21 105.41,30.48 v97.79,30.48
  Bottom 0.305: v97.79,30.48 IC28.8 | IC30.11 38.1,44.45 38.1,34.29 39.37,33.02 55.88,33.02 60.96,27.94 81.28,27.94 86.36,22.86 86.36,13.97 105.41,13.97 106.68,15.24 JP2.11
D4  (via drill 0.35)
  Top 0.305: v104.14,40.64 99.06,40.64 97.79,41.91 IC28.13 | v104.14,29.21 104.14,27.94 JP2.12
  Bottom 0.305: v104.14,40.64 v104.14,29.21
D5  (via drill 0.35)
  Top 0.305: JP2.13 101.6,27.94 100.33,29.21 v96.52,29.21
  Bottom 0.305: v96.52,29.21 96.52,40.64 95.25,41.91 IC28.14
D6  (via drill 0.35)
  Top 0.305: JP2.14 99.06,21.59 v88.9,31.75
  Bottom 0.305: v88.9,31.75 88.9,40.64 87.63,41.91 IC28.17
D7  (via drill 0.35)
  Top 0.305: JP2.15 96.52,21.59 v86.36,31.75
  Bottom 0.305: v86.36,31.75 86.36,40.64 85.09,41.91 IC28.18
D8  (via drill 0.35)
  Top 0.305: JP2.16 93.98,21.59 81.28,34.29 v59.69,34.29 | v59.69,40.64 58.42,41.91 IC25.14
  Bottom 0.305: v59.69,34.29 v59.69,40.64
D9  (via drill 0.35)
  Top 0.305: JP2.17 91.44,22.86 81.28,33.02 v62.23,33.02 | v62.23,40.64 60.96,41.91 IC25.13
  Bottom 0.305: v62.23,33.02 v62.23,40.64
D10  (via drill 0.35)
  Top 0.305: JP2.18 88.9,24.13 81.28,31.75 v64.77,31.75 | v64.77,40.64 63.5,41.91 IC25.12
  Bottom 0.305: v64.77,31.75 v64.77,40.64
DATABUS0  (via drill 0.35)
  Top 0.305: v33.02,49.53 33.02,50.8 38.1,55.88 v83.82,55.88 125.73,55.88 127,57.15 127,78.74 128.27,80.01 176.53,80.01 177.8,81.28 v177.8,135.89 v177.8,176.53 v177.8,231.14 v177.8,242.57 177.8,298.45 | v144.78,135.89 v163.83,135.89 | V1.15 147.32,176.53 v163.83,176.53 | v66.04,177.8 66.04,184.15 93.98,184.15 95.25,185.42 106.68,185.42 107.95,186.69 v147.32,186.69 | IC58.18 237.49,231.14 v195.58,231.14 v185.42,231.14 | v119.38,242.57 v146.05,242.57 v157.48,242.57 | v34.29,285.75 77.47,285.75 78.74,284.48 v80.01,284.48 v102.87,284.48 | v118.11,259.08 v118.11,265.43 | IC63.3 IC63.14 v109.22,317.5 v135.89,317.5 | IC64.3 IC64.14 | 177.8,298.45 v173.99,298.45 | 177.8,298.45 v207.01,298.45 | IC66.3 IC66.2 | v104.14,317.5 v74.93,317.5 | IC65.2 IC65.3
  Bottom 0.305: IC30.2 31.75,43.18 33.02,44.45 v33.02,49.53 | IC37.3 v144.78,135.89 | v163.83,135.89 v177.8,135.89 | v163.83,176.53 v177.8,176.53 | IC32.18 v66.04,177.8 | v147.32,186.69 V1.15 | v185.42,231.14 v177.8,231.14 | IC43.4 v146.05,242.57 | v157.48,242.57 v177.8,242.57 | v119.38,242.57 IC42.4 119.38,251.46 118.11,252.73 v118.11,259.08 | v34.29,285.75 IC47.18 | v118.11,265.43 101.6,265.43 IC50.3 101.6,276.86 102.87,278.13 v102.87,284.48 | v135.89,317.5 IC64.14 | v207.01,298.45 IC66.2 | v109.22,317.5 v104.14,317.5 | v74.93,317.5 74.93,295.91 80.01,290.83 v80.01,284.48 | IC28.2 82.55,40.64 83.82,41.91 v83.82,55.88 | IC60.3 195.58,220.98 v195.58,231.14 | v173.99,298.45 IC65.3
DATABUS1  (via drill 0.35)
  Top 0.305: v40.64,49.53 40.64,50.8 43.18,53.34 v88.9,53.34 | v147.32,134.62 v163.83,134.62 | v144.78,162.56 v163.83,162.56 | v83.82,160.02 v140.97,160.02 | IC58.17 240.03,232.41 v198.12,232.41 v185.42,232.41 | v176.53,297.18 v176.53,241.3 v176.53,232.41 v176.53,162.56 v176.53,134.62 176.53,82.55 175.26,81.28 127,81.28 125.73,80.01 125.73,58.42 124.46,57.15 v88.9,57.15 | v127,241.3 v153.67,241.3 | v36.83,287.02 77.47,287.02 78.74,285.75 v81.28,285.75 105.41,285.75 v105.41,284.48 | IC64.13 IC64.4 | v138.43,316.23 111.76,316.23 IC63.13 v111.76,307.34 IC63.4 | IC65.5 IC65.4 | IC66.4 IC66.5 | v179.07,297.18 v212.09,297.18 | v118.11,266.7 124.46,266.7 125.73,265.43 v129.54,265.43
  Bottom 0.305: IC30.5 39.37,43.18 40.64,44.45 v40.64,49.53 | v88.9,57.15 v88.9,53.34 88.9,41.91 90.17,40.64 IC28.5 | IC37.4 v147.32,134.62 | v163.83,134.62 v176.53,134.62 | V1.1 v144.78,162.56 142.24,160.02 v140.97,160.02 | v163.83,162.56 v176.53,162.56 | IC32.17 69.85,172.72 69.85,161.29 71.12,160.02 v83.82,160.02 | v185.42,232.41 v176.53,232.41 | IC43.7 v153.67,241.3 v176.53,241.3 | v127,241.3 IC42.7 127,250.19 128.27,251.46 128.27,257.81 129.54,259.08 v129.54,265.43 | v36.83,287.02 IC47.17 | v118.11,266.7 104.14,266.7 IC50.4 104.14,276.86 105.41,278.13 v105.41,284.48 | v179.07,297.18 v176.53,297.18 IC65.4 | v212.09,297.18 IC66.4 | v81.28,285.75 81.28,306.07 82.55,307.34 v111.76,307.34 | IC60.4 198.12,220.98 v198.12,232.41 | IC64.13 v138.43,316.23
DATABUS2  (via drill 0.35)
  Top 0.305: v41.91,49.53 41.91,50.8 43.18,52.07 v91.44,52.07 | v154.94,133.35 v163.83,133.35 | v160.02,177.8 v163.83,177.8 | v71.12,177.8 71.12,182.88 93.98,182.88 95.25,184.15 106.68,184.15 107.95,185.42 v158.75,185.42 | IC58.16 242.57,233.68 v205.74,233.68 v185.42,233.68 | v175.26,295.91 v175.26,256.54 v175.26,233.68 v175.26,177.8 v175.26,133.35 175.26,83.82 173.99,82.55 125.73,82.55 124.46,81.28 124.46,59.69 123.19,58.42 v91.44,58.42 | IC43.13 146.05,256.54 v158.75,256.54 | v146.05,259.08 v119.38,259.08 v119.38,265.43 | v39.37,288.29 77.47,288.29 78.74,287.02 v87.63,287.02 107.95,287.02 v107.95,284.48 | IC63.5 v114.3,306.07 IC63.12 114.3,314.96 v140.97,314.96 | IC64.5 IC64.12 | IC65.6 IC65.7 | IC66.6 IC66.7 | v181.61,295.91 v217.17,295.91
  Bottom 0.305: IC30.9 v41.91,49.53 | v91.44,58.42 v91.44,52.07 91.44,41.91 92.71,40.64 IC28.6 | IC37.7 v154.94,133.35 | v163.83,133.35 v175.26,133.35 | v163.83,177.8 v175.26,177.8 | IC32.16 v71.12,177.8 | v158.75,185.42 160.02,184.15 v160.02,177.8 V1.10 | v185.42,233.68 v175.26,233.68 | IC60.7 205.74,220.98 v205.74,233.68 | v158.75,256.54 v175.26,256.54 | IC42.13 v119.38,259.08 | v146.05,259.08 IC43.13 | v39.37,288.29 IC47.16 | v119.38,265.43 119.38,267.97 106.68,267.97 IC50.5 106.68,276.86 107.95,278.13 v107.95,284.48 | v217.17,295.91 IC66.6 | v114.3,306.07 97.79,306.07 97.79,299.72 87.63,299.72 v87.63,287.02 | IC65.6 v181.61,295.91 v175.26,295.91 | v140.97,314.96 IC64.12
DATABUS3  (via drill 0.35)
  Top 0.305: v34.29,49.53 34.29,50.8 38.1,54.61 v99.06,54.61 | v157.48,132.08 v163.83,132.08 | v162.56,186.69 161.29,186.69 158.75,184.15 107.95,184.15 106.68,182.88 95.25,182.88 93.98,181.61 73.66,181.61 v73.66,177.8 | IC58.15 245.11,234.95 v208.28,234.95 v185.42,234.95 | v173.99,294.64 v173.99,257.81 v173.99,234.95 v173.99,179.07 v173.99,132.08 173.99,85.09 172.72,83.82 124.46,83.82 123.19,82.55 123.19,60.96 121.92,59.69 v99.06,59.69 | IC43.14 143.51,257.81 | 143.51,257.81 v158.75,257.81 | 143.51,257.81 v116.84,257.81 v116.84,269.24 | v41.91,289.56 77.47,289.56 78.74,288.29 v88.9,288.29 110.49,288.29 v110.49,284.48 | IC63.6 v116.84,304.8 IC63.11 116.84,313.69 143.51,313.69 IC64.11 IC64.6 | IC65.8 IC65.9 | IC66.8 IC66.9 | v186.69,294.64 v222.25,294.64
  Bottom 0.305: IC28.9 100.33,43.18 99.06,44.45 v99.06,54.61 v99.06,59.69 | IC30.12 v34.29,49.53 | IC37.8 v157.48,132.08 | v163.83,132.08 v173.99,132.08 | V1.9 162.56,179.07 | 162.56,179.07 v173.99,179.07 | IC32.15 v73.66,177.8 | v162.56,186.69 162.56,179.07 | v185.42,234.95 v173.99,234.95 | IC60.8 208.28,220.98 v208.28,234.95 | v158.75,257.81 v173.99,257.81 | IC42.14 v116.84,257.81 | v116.84,269.24 109.22,269.24 IC50.6 109.22,276.86 110.49,278.13 v110.49,284.48 | v41.91,289.56 IC47.15 | v222.25,294.64 IC66.8 | v116.84,304.8 99.06,304.8 99.06,298.45 88.9,298.45 v88.9,288.29 | IC65.8 v186.69,294.64 v173.99,294.64
DATABUS4  (via drill 0.35)
  Top 0.305: V2.15 121.92,176.53 146.05,176.53 147.32,177.8 158.75,177.8 161.29,180.34 v163.83,180.34 | v121.92,182.88 107.95,182.88 106.68,181.61 95.25,181.61 93.98,180.34 76.2,180.34 v76.2,177.8 | IC58.14 247.65,236.22 v207.01,236.22 v185.42,236.22 | v44.45,290.83 77.47,290.83 78.74,289.56 v163.83,289.56 | v172.72,289.56 v172.72,236.22 v172.72,180.34 v172.72,153.67 172.72,86.36 171.45,85.09 123.19,85.09 121.92,83.82 121.92,62.23 120.65,60.96 v100.33,60.96 | IC65.13 IC65.12 | IC66.12 IC66.13 | v189.23,313.69 v222.25,313.69
  Bottom 0.305: IC28.12 v100.33,60.96 | IC37.13 157.48,153.67 v172.72,153.67 | v163.83,180.34 v172.72,180.34 | IC32.14 v76.2,177.8 | v185.42,236.22 v172.72,236.22 | IC60.13 v207.01,236.22 | IC47.14 v44.45,290.83 | v163.83,289.56 v172.72,289.56 190.5,289.56 190.5,308.61 IC65.12 v189.23,313.69 | v222.25,313.69 IC66.13 | V2.15 v121.92,182.88
DATABUS5  (via drill 0.35)
  Top 0.305: v154.94,152.4 v163.83,152.4 | v119.38,162.56 142.24,162.56 143.51,161.29 v163.83,161.29 | v171.45,293.37 v171.45,161.29 v171.45,152.4 171.45,87.63 170.18,86.36 121.92,86.36 120.65,85.09 120.65,63.5 119.38,62.23 v92.71,62.23 | v179.07,293.37 v218.44,293.37 | IC66.14 IC66.15 | v83.82,161.29 v115.57,161.29
  Bottom 0.305: IC28.15 v92.71,62.23 | v154.94,152.4 IC37.14 | v163.83,152.4 v171.45,152.4 | V2.1 v119.38,162.56 118.11,162.56 116.84,161.29 v115.57,161.29 | v163.83,161.29 v171.45,161.29 | IC32.13 78.74,168.91 80.01,167.64 80.01,161.29 v83.82,161.29 | v171.45,293.37 v179.07,293.37 | v218.44,293.37 218.44,308.61 IC66.15
DATABUS6  (via drill 0.35)
  Top 0.305: v147.32,151.13 v163.83,151.13 | v134.62,177.8 v139.7,177.8 146.05,177.8 147.32,179.07 158.75,179.07 161.29,181.61 v163.83,181.61 | v81.28,177.8 81.28,179.07 93.98,179.07 95.25,180.34 106.68,180.34 107.95,181.61 133.35,181.61 134.62,182.88 v139.7,182.88 | v179.07,292.1 v213.36,292.1 | v170.18,292.1 v170.18,181.61 v170.18,151.13 170.18,88.9 168.91,87.63 120.65,87.63 119.38,86.36 119.38,64.77 118.11,63.5 v90.17,63.5 | IC66.16 IC66.17
  Bottom 0.305: IC28.16 v90.17,63.5 | v147.32,151.13 IC37.17 | v163.83,151.13 v170.18,151.13 | V2.10 v134.62,177.8 | v163.83,181.61 v170.18,181.61 | IC32.12 v81.28,177.8 | v139.7,182.88 v139.7,177.8 | v170.18,292.1 v179.07,292.1 | v213.36,292.1 213.36,308.61 IC66.17
DATABUS7  (via drill 0.35)
  Top 0.305: IC37.18 144.78,149.86 v163.83,149.86 | v137.16,179.07 146.05,179.07 147.32,180.34 158.75,180.34 161.29,182.88 v163.83,182.88 | v83.82,177.8 93.98,177.8 95.25,179.07 106.68,179.07 107.95,180.34 v130.81,180.34 | v168.91,290.83 v168.91,182.88 v168.91,149.86 168.91,90.17 167.64,88.9 119.38,88.9 118.11,87.63 118.11,66.04 116.84,64.77 v82.55,64.77 | v179.07,290.83 v208.28,290.83 | IC66.18 IC66.19
  Bottom 0.305: IC28.19 v82.55,64.77 | v163.83,149.86 v168.91,149.86 | V2.9 v137.16,179.07 137.16,180.34 v130.81,180.34 | v163.83,182.88 v168.91,182.88 | IC32.11 v83.82,177.8 | v168.91,290.83 v179.07,290.83 | v208.28,290.83 208.28,308.61 IC66.19
DATABUS8  (via drill 0.35)
  Top 0.305: v116.84,151.13 116.84,153.67 144.78,153.67 146.05,154.94 152.4,154.94 154.94,157.48 v163.83,157.48 | v96.52,177.8 132.08,177.8 134.62,180.34 146.05,180.34 147.32,181.61 158.75,181.61 161.29,184.15 v163.83,184.15 | v92.71,186.69 63.5,186.69 63.5,179.07 34.29,179.07 v34.29,177.8 | IC67.14 IC67.3 | v179.07,287.02 245.11,287.02 v245.11,298.45 | v167.64,287.02 v167.64,184.15 v167.64,157.48 167.64,91.44 166.37,90.17 118.11,90.17 116.84,88.9 116.84,67.31 115.57,66.04 v59.69,66.04
  Bottom 0.305: IC25.3 58.42,43.18 59.69,44.45 v59.69,66.04 | IC38.14 v116.84,151.13 | v163.83,157.48 v167.64,157.48 | v163.83,184.15 v167.64,184.15 | v92.71,186.69 92.71,177.8 95.25,177.8 | v34.29,177.8 IC33.18 | v167.64,287.02 v179.07,287.02 | v245.11,298.45 IC67.3 | 95.25,177.8 V3.15 | v96.52,177.8 95.25,177.8
DATABUS9  (via drill 0.35)
  Top 0.305: v119.38,151.13 119.38,152.4 144.78,152.4 146.05,153.67 152.4,153.67 154.94,156.21 v163.83,156.21 | v92.71,162.56 116.84,162.56 118.11,161.29 142.24,161.29 143.51,160.02 v163.83,160.02 | V3.1 92.71,167.64 91.44,168.91 v36.83,168.91 | IC67.4 IC67.13 | v179.07,285.75 247.65,285.75 v247.65,298.45 | v166.37,285.75 v166.37,160.02 v166.37,156.21 166.37,92.71 165.1,91.44 116.84,91.44 115.57,90.17 115.57,68.58 114.3,67.31 v62.23,67.31
  Bottom 0.305: IC25.4 60.96,43.18 62.23,44.45 v62.23,67.31 | IC38.13 v119.38,151.13 | v163.83,156.21 v166.37,156.21 | V3.1 v92.71,162.56 | v163.83,160.02 v166.37,160.02 | v36.83,168.91 IC33.17 | v166.37,285.75 v179.07,285.75 | v247.65,298.45 IC67.4
DATABUS10  (via drill 0.35)
  Top 0.305: 165.1,154.94 165.1,93.98 163.83,92.71 115.57,92.71 114.3,91.44 114.3,69.85 113.03,68.58 v64.77,68.58 | 165.1,154.94 165.1,185.42 | v121.92,151.13 144.78,151.13 146.05,152.4 152.4,152.4 154.94,154.94 165.1,154.94 | 165.1,185.42 161.29,185.42 158.75,182.88 147.32,182.88 146.05,181.61 134.62,181.61 132.08,179.07 v109.22,179.07 | v105.41,186.69 95.25,186.69 93.98,185.42 64.77,185.42 64.77,177.8 v39.37,177.8 | 165.1,185.42 v165.1,284.48 | IC67.5 IC67.12 | v179.07,284.48 250.19,284.48 v250.19,298.45
  Bottom 0.305: IC25.5 63.5,43.18 64.77,44.45 v64.77,68.58 | IC38.12 v121.92,151.13 | v39.37,177.8 IC33.16 | v165.1,284.48 v179.07,284.48 | v250.19,298.45 IC67.5 | v109.22,179.07 107.95,179.07 | 107.95,179.07 V3.10 | v105.41,186.69 105.41,179.07 107.95,179.07
DATABUSTORAM  (via drill 0.35)
  Top 0.305: v231.14,124.46 226.06,124.46 224.79,125.73 207.01,125.73 205.74,127 199.39,127 198.12,128.27 v185.42,128.27 | v163.83,128.27 163.83,110.49 161.29,107.95 161.29,97.79 160.02,96.52 99.06,96.52 96.52,99.06 v67.31,99.06
  Bottom 0.305: IC22.8 v231.14,124.46 | v185.42,128.27 v163.83,128.27 | IC27.6 67.31,86.36 v67.31,99.06
DECODECLOCK
  Bottom 0.305: IC4.6 238.76,39.37 238.76,53.34 228.6,53.34 228.6,59.69 227.33,60.96 IC7.14
EEPROMOUT  (via drill 0.35)
  Top 0.305: IC21.13 191.77,143.51 | 191.77,143.51 IC21.2 | IC21.10 199.39,143.51 | IC23.13 191.77,116.84 | IC23.2 191.77,116.84 | IC23.10 199.39,116.84 | IC23.5 199.39,116.84 | IC22.2 v218.44,116.84 | IC22.10 226.06,116.84 | 226.06,116.84 IC22.5 | IC20.10 226.06,143.51 | IC18.5 226.06,170.18 | 226.06,170.18 IC18.10 | IC19.10 199.39,170.18 | IC19.13 191.77,170.18 | 191.77,170.18 IC19.2 | IC17.5 199.39,196.85 | 199.39,196.85 IC17.10 | IC17.13 191.77,196.85 | 191.77,196.85 IC17.2 | v218.44,196.85 IC16.2 | IC16.10 226.06,196.85 | 226.06,196.85 IC16.5 | 226.06,196.85 v218.44,196.85 | v218.44,196.85 199.39,196.85 | 199.39,196.85 191.77,196.85 | 226.06,170.18 v218.44,170.18 | v218.44,170.18 199.39,170.18 | 199.39,170.18 191.77,170.18 | 226.06,143.51 v218.44,143.51 218.44,142.24 | 218.44,142.24 199.39,142.24 | 199.39,143.51 191.77,143.51 | 226.06,116.84 v218.44,116.84 | v218.44,116.84 199.39,116.84 | 199.39,116.84 191.77,116.84 | IC24.10 226.06,88.9 | 226.06,88.9 IC24.5 | IC24.2 218.44,88.9 | 218.44,88.9 IC24.13 | 218.44,88.9 226.06,88.9 | 191.77,116.84 184.15,116.84 | 184.15,116.84 184.15,88.9 | 218.44,88.9 184.15,88.9 | 184.15,116.84 184.15,143.51 | 184.15,143.51 191.77,143.51 | 184.15,143.51 184.15,170.18 | 184.15,170.18 191.77,170.18 | 191.77,196.85 184.15,196.85 184.15,170.18 | IC18.2 v218.44,170.18 | IC20.5 226.06,143.51 | IC20.2 218.44,142.24 | IC21.5 199.39,142.24 | 199.39,142.24 199.39,143.51 | IC19.5 199.39,170.18 | v223.52,69.85 184.15,69.85 184.15,88.9
  Bottom 0.305: IC7.2 223.52,59.69 v223.52,69.85 | IC18.13 v218.44,170.18 | v218.44,143.51 IC20.13 | v218.44,116.84 IC22.13 | v218.44,196.85 IC16.13
EEPROMRESET  (via drill 0.35)
  Top 0.305: v262.89,74.93 232.41,74.93 228.6,71.12 v200.66,71.12
  Bottom 0.305: IC15.10 v262.89,74.93 | v200.66,71.12 200.66,59.69 IC9.2
FLAGJSRLATCH  (via drill 0.35)
  Top 0.305: v191.77,316.23 260.35,316.23 261.62,314.96 261.62,217.17 271.78,207.01 v271.78,157.48
  Bottom 0.305: v191.77,316.23 IC65.11 | v271.78,157.48 238.76,157.48 237.49,156.21 223.52,156.21 IC20.11
FLAGJSROUTPUT  (via drill 0.35)
  Top 0.305: v63.5,321.31 148.59,321.31 151.13,318.77 261.62,318.77 262.89,317.5 262.89,217.17 273.05,207.01 v273.05,156.21
  Bottom 0.305: IC61.12 v63.5,321.31 | v273.05,156.21 238.76,156.21 237.49,154.94 231.14,154.94 IC20.8
FLAGLATCH
  Bottom 0.305: IC60.11 214.63,224.79 214.63,219.71 205.74,210.82 205.74,177.8 204.47,176.53 IC19.8
FLAGOUTPUT  (via drill 0.35)
  Top 0.305: v247.65,269.24 v231.14,269.24
  Bottom 0.305: IC56.4 v247.65,269.24 | v231.14,269.24 231.14,242.57 229.87,241.3 218.44,241.3 218.44,220.98 207.01,209.55 207.01,171.45 IC19.6
FUNCTION0  (via drill 0.35)
  Top 0.305: v185.42,187.96 v201.93,187.96 | v162.56,195.58 v144.78,195.58
  Bottom 0.305: IC17.6 v201.93,187.96 | v162.56,195.58 165.1,195.58 172.72,187.96 v185.42,187.96 | v144.78,195.58 144.78,226.06 IC48.14
FUNCTION1  (via drill 0.35)
  Top 0.305: v194.31,189.23 v185.42,189.23 | v162.56,196.85 v149.86,196.85
  Bottom 0.305: IC17.3 v194.31,189.23 | v185.42,189.23 172.72,189.23 165.1,196.85 v162.56,196.85 | IC48.12 149.86,226.06 v149.86,196.85
FUNCTION2  (via drill 0.35)
  Top 0.305: v223.52,205.74 199.39,205.74 198.12,207.01 v181.61,207.01 | v162.56,207.01 v151.13,207.01
  Bottom 0.305: IC16.11 v223.52,205.74 | v181.61,207.01 v162.56,207.01 | v151.13,207.01 IC48.6
FUNCTION3  (via drill 0.35)
  Top 0.305: v231.14,207.01 199.39,207.01 198.12,208.28 v181.61,208.28 | v162.56,208.28 v146.05,208.28
  Bottom 0.305: IC16.8 v231.14,207.01 | v181.61,208.28 v162.56,208.28 | v146.05,208.28 IC48.4
GND  (via drill 0.35)
  Top 0.305: IC11.20 v250.19,198.12 250.19,191.77 248.92,190.5 248.92,187.96 250.19,186.69 IC12.20 250.19,165.1 248.92,163.83 248.92,161.29 250.19,160.02 IC13.20 250.19,138.43 248.92,137.16 248.92,134.62 250.19,133.35 IC14.20 250.19,111.76 248.92,110.49 248.92,107.95 250.19,106.68 IC15.20 | IC11.19 v252.73,198.12 252.73,191.77 251.46,190.5 251.46,187.96 252.73,186.69 IC12.19 252.73,165.1 251.46,163.83 251.46,161.29 252.73,160.02 IC13.19 252.73,138.43 251.46,137.16 251.46,134.62 252.73,133.35 IC14.19 252.73,111.76 251.46,110.49 251.46,107.95 252.73,106.68 IC15.19 | IC11.18 v255.27,198.12 255.27,191.77 254,190.5 254,187.96 255.27,186.69 IC12.18 255.27,165.1 254,163.83 254,161.29 255.27,160.02 IC13.18 255.27,138.43 254,137.16 254,134.62 255.27,133.35 IC14.18 255.27,111.76 254,110.49 254,107.95 255.27,106.68 IC15.18 | 204.47,110.49 185.42,110.49 E$15.1 | 204.47,110.49 IC23.7 | 204.47,137.16 185.42,137.16 E$14.1 | 204.47,137.16 IC21.7 | E$13.1 185.42,163.83 204.47,163.83 | 204.47,163.83 IC19.7 | E$12.1 185.42,190.5 204.47,190.5 | 204.47,190.5 IC17.7 | 204.47,190.5 212.09,190.5 | E$11.1 212.09,190.5 | 204.47,163.83 212.09,163.83 | 212.09,163.83 231.14,163.83 | IC18.7 231.14,163.83 | E$10.1 212.09,163.83 | 212.09,137.16 231.14,137.16 | 212.09,137.16 204.47,137.16 | IC20.7 231.14,137.16 | E$9.1 212.09,137.16 | 204.47,110.49 212.09,110.49 | 212.09,110.49 231.14,110.49 | 231.14,110.49 IC22.7 | E$8.1 212.09,110.49 | E$7.1 212.09,82.55 231.14,82.55 | 231.14,82.55 236.22,82.55 | 236.22,82.55 E$6.1 | 231.14,110.49 236.22,110.49 | 236.22,110.49 E$5.1 | 231.14,137.16 236.22,137.16 | 236.22,137.16 E$4.1
  Top 0.305: 231.14,163.83 236.22,163.83 | E$3.1 236.22,163.83 | IC15.12 267.97,78.74 237.49,78.74 236.22,80.01 236.22,82.55 | 231.14,190.5 236.22,190.5 | 231.14,190.5 212.09,190.5 | 231.14,190.5 IC16.7 | E$1.1 236.22,190.5 | IC8.7 161.29,55.88 | 167.64,55.88 161.29,55.88 | 167.64,55.88 186.69,55.88 | 186.69,55.88 IC10.7 | 186.69,55.88 193.04,55.88 | 193.04,55.88 212.09,55.88 | 212.09,55.88 218.44,55.88 | 218.44,55.88 240.03,55.88 | 240.03,55.88 246.38,55.88 | 246.38,55.88 267.97,55.88 IC6.8 | E$16.1 246.38,55.88 | 240.03,55.88 IC7.8 236.22,62.23 233.68,62.23 IC7.13 | E$17.1 218.44,55.88 | IC9.7 212.09,55.88 | E$18.1 193.04,55.88 | E$19.1 167.64,55.88 | 161.29,55.88 142.24,55.88 E$20.1 | IC2.8 267.97,35.56 246.38,35.56 | 246.38,35.56 E$25.1 | 246.38,35.56 240.03,35.56 | 240.03,35.56 220.98,35.56 | 220.98,35.56 212.09,35.56 | 212.09,35.56 IC5.7 | 212.09,35.56 193.04,35.56 | 193.04,35.56 E$23.1 | 193.04,35.56 187.96,35.56 | 187.96,35.56 IC1.8 184.15,41.91 181.61,41.91 IC1.13 | 166.37,35.56 E$22.1 | 187.96,35.56 166.37,35.56 | 166.37,35.56 161.29,35.56 | 161.29,35.56 142.24,35.56 E$21.1 | E$26.1 220.98,35.56 | IC4.7 240.03,35.56 | IC3.7 161.29,35.56 | 111.76,34.29 107.95,34.29 107.95,35.56 | 111.76,34.29 134.62,34.29 IC29.10 | E$27.1 107.95,35.56 | IC29.1 111.76,34.29 | 49.53,35.56 E$29.1 IC25.15 | 49.53,35.56 71.12,35.56 | 71.12,35.56 IC25.8 IC25.9 IC25.10 IC25.11 | 71.12,35.56 76.2,35.56 | 76.2,35.56 E$28.1 | 76.2,35.56 102.87,35.56 | 102.87,35.56 IC28.10 | 102.87,35.56 107.95,35.56 | E$24.1 25.4,35.56 44.45,35.56 | 44.45,35.56 49.53,35.56 | IC30.7 44.45,35.56 | E$30.1 25.4,82.55 44.45,82.55 | 44.45,82.55 IC26.7 | 44.45,82.55 49.53,82.55 | 49.53,82.55 E$31.1 | 49.53,82.55 57.15,82.55
  Top 0.305: 57.15,82.55 71.12,82.55 | IC27.8 71.12,82.55 | 71.12,82.55 76.2,82.55 | 76.2,82.55 95.25,82.55 IC31.7 | E$32.1 76.2,82.55 | 107.95,137.16 E$34.1 IC38.15 | 107.95,137.16 129.54,137.16 | 129.54,137.16 IC38.8 | 129.54,137.16 135.89,137.16 | E$33.1 135.89,137.16 | 135.89,137.16 162.56,137.16 IC37.10 | 52.07,137.16 IC36.10 | 52.07,137.16 57.15,137.16 | 57.15,137.16 83.82,137.16 | 83.82,137.16 107.95,137.16 | E$35.1 57.15,137.16 | IC35.10 83.82,137.16 | 52.07,163.83 57.15,163.83 | 57.15,163.83 83.82,163.83 | 83.82,163.83 IC32.10 | E$38.1 57.15,163.83 | IC33.10 52.07,163.83 | 83.82,163.83 88.9,163.83 | 88.9,163.83 E$39.1 | 88.9,163.83 110.49,163.83 | 110.49,163.83 V3.8 V3.9 | 110.49,163.83 115.57,163.83 | E$40.1 115.57,163.83 | 115.57,163.83 137.16,163.83 | 137.16,163.83 V2.8 | 137.16,163.83 140.97,163.83 | E$41.1 140.97,163.83 | V1.8 162.56,163.83 140.97,163.83 | IC38.9 IC38.10 IC38.11 | 90.17,190.5 109.22,190.5 IC39.7 | E$44.1 90.17,190.5 | 90.17,190.5 76.2,190.5 | 76.2,190.5 IC40.7 | 76.2,190.5 57.15,190.5 | 57.15,190.5 E$43.1 | IC34.8 46.99,190.5 | 46.99,190.5 57.15,190.5 | E$42.1 25.4,190.5 30.48,190.5 | 46.99,190.5 30.48,190.5 | E$45.1 185.42,218.44 186.69,217.17 189.23,217.17 | 189.23,217.17 212.09,217.17 | 212.09,217.17 IC60.10 | 212.09,217.17 228.6,217.17 | 228.6,217.17 255.27,217.17 IC58.10 | E$46.1 228.6,217.17 | E$49.1 185.42,271.78 186.69,270.51 204.47,270.51 | 204.47,270.51 IC55.7 | 204.47,270.51 209.55,270.51 | 209.55,270.51 E$50.1 | 209.55,270.51 228.6,270.51 | 228.6,270.51 IC59.7 | 228.6,270.51 236.22,270.51 | 236.22,270.51 E$51.1 | 236.22,270.51 252.73,270.51 | 252.73,270.51 255.27,270.51 | 255.27,270.51 257.81,270.51 IC56.8 | E$47.1 185.42,245.11 186.69,243.84 204.47,243.84
  Top 0.305: 204.47,243.84 IC53.7 | 204.47,243.84 209.55,243.84 | E$48.1 209.55,243.84 | 209.55,243.84 228.6,243.84 | 228.6,243.84 IC54.7 | 228.6,243.84 236.22,243.84 | 236.22,243.84 E$52.1 | 236.22,243.84 255.27,243.84 IC57.7 | IC60.1 189.23,217.17 | IC42.8 129.54,243.84 | 129.54,243.84 134.62,243.84 | 134.62,243.84 E$55.1 | 134.62,243.84 156.21,243.84 IC43.8 | E$53.1 124.46,270.51 | 124.46,270.51 124.46,267.97 125.73,266.7 156.21,266.7 IC41.12 | 44.45,243.84 IC52.7 | 44.45,243.84 52.07,243.84 | 52.07,243.84 71.12,243.84 | 71.12,243.84 78.74,243.84 | 78.74,243.84 97.79,243.84 | 97.79,243.84 107.95,243.84 | 107.95,243.84 129.54,243.84 | E$54.1 107.95,243.84 | E$56.1 78.74,243.84 | IC51.7 71.12,243.84 | E$57.1 52.07,243.84 | E$63.1 25.4,270.51 52.07,270.51 | 52.07,270.51 62.23,270.51 | 62.23,270.51 81.28,270.51 | 81.28,270.51 92.71,270.51 | 92.71,270.51 114.3,270.51 | 114.3,270.51 124.46,270.51 | 114.3,270.51 IC50.8 IC50.9 IC50.10 | E$59.1 92.71,270.51 | IC46.7 81.28,270.51 | E$60.1 62.23,270.51 | IC49.8 129.54,217.17 | 129.54,217.17 134.62,217.17 | 134.62,217.17 156.21,217.17 IC48.8 | E$61.1 134.62,217.17 | IC47.10 52.07,270.51 | E$64.1 78.74,217.17 97.79,217.17 | 97.79,217.17 107.95,217.17 | 107.95,217.17 129.54,217.17 | E$62.1 107.95,217.17 | IC45.7 97.79,217.17 | IC44.7 97.79,243.84 | IC68.7 95.25,299.72 | 95.25,299.72 76.2,299.72 | 76.2,299.72 E$65.1 | 76.2,299.72 71.12,299.72 | 71.12,299.72 IC61.8 | 71.12,299.72 49.53,299.72 | 49.53,299.72 E$66.1 | 49.53,299.72 44.45,299.72 | 44.45,299.72 25.4,299.72 E$67.1 | 100.33,299.72 E$68.1 IC63.15 | 100.33,299.72 95.25,299.72 | 100.33,299.72 121.92,299.72 | 121.92,299.72 IC63.8 IC63.9 IC63.10 | E$69.1 127,299.72 | 121.92,299.72 127,299.72
  Top 0.305: 127,299.72 148.59,299.72 IC64.8 IC64.9 | E$72.1 165.1,300.99 166.37,299.72 191.77,299.72 | 191.77,299.72 IC65.10 | 191.77,299.72 200.66,299.72 | 200.66,299.72 E$71.1 | 200.66,299.72 227.33,299.72 | 227.33,299.72 IC66.10 | 227.33,299.72 236.22,299.72 | 236.22,299.72 257.81,299.72 IC67.8 IC67.9 IC67.10 IC67.11 | 236.22,299.72 E$70.1 IC67.15 | IC24.7 231.14,82.55 | E$58.1 25.4,243.84 44.45,243.84 | E$37.1 25.4,163.83 52.07,163.83 | E$36.1 25.4,137.16 52.07,137.16 | 236.22,190.5 238.76,190.5 v238.76,198.12 | 236.22,163.83 238.76,163.83 v238.76,171.45 | 236.22,137.16 238.76,137.16 v238.76,144.78 | 236.22,110.49 238.76,110.49 v238.76,116.84 | IC62.7 44.45,299.72 | IC27.15 57.15,92.71 | 57.15,92.71 IC27.14 | 57.15,82.55 57.15,92.71 | 39.37,198.12 34.29,198.12 | 34.29,198.12 31.75,198.12 | IC34.12 39.37,198.12 | IC34.15 31.75,198.12 | 31.75,198.12 30.48,196.85 30.48,190.5 | IC34.14 34.29,198.12 | 39.37,198.12 41.91,198.12 IC34.11 | IC56.6 252.73,270.51 | IC56.7 255.27,270.51
  Top 0.813: v2.54,299.72 v2.54,270.51 v2.54,243.84 v2.54,217.17 v2.54,190.5 v2.54,163.83 v2.54,137.16 v2.54,82.55 v2.54,35.56 2.54,2.54 144.78,2.54 149.94,7.7 E$2.GND 274.75,7.7 E$2.GNDBREAK 278.48,11.43 283.21,11.43 v283.21,38.1 v283.21,58.42 v283.21,81.28 v283.21,109.22 v283.21,135.89 v283.21,162.56 v283.21,189.23 v283.21,219.71 v283.21,246.38 v283.21,273.05 v283.21,302.26